# Altium PCB waku-ctl.PcbDoc (part 4 of 5)
Units mil, origin at the board's own origin, x right, y up, seen from the top; angles counter-clockwise.
Board outline 3530 x 2610 mil, 2 copper layers (Top Layer, Bottom Layer); 84 components, 84 nets, 358 pads, 106 vias.
Unrouted connection lines stored in the file: 42.
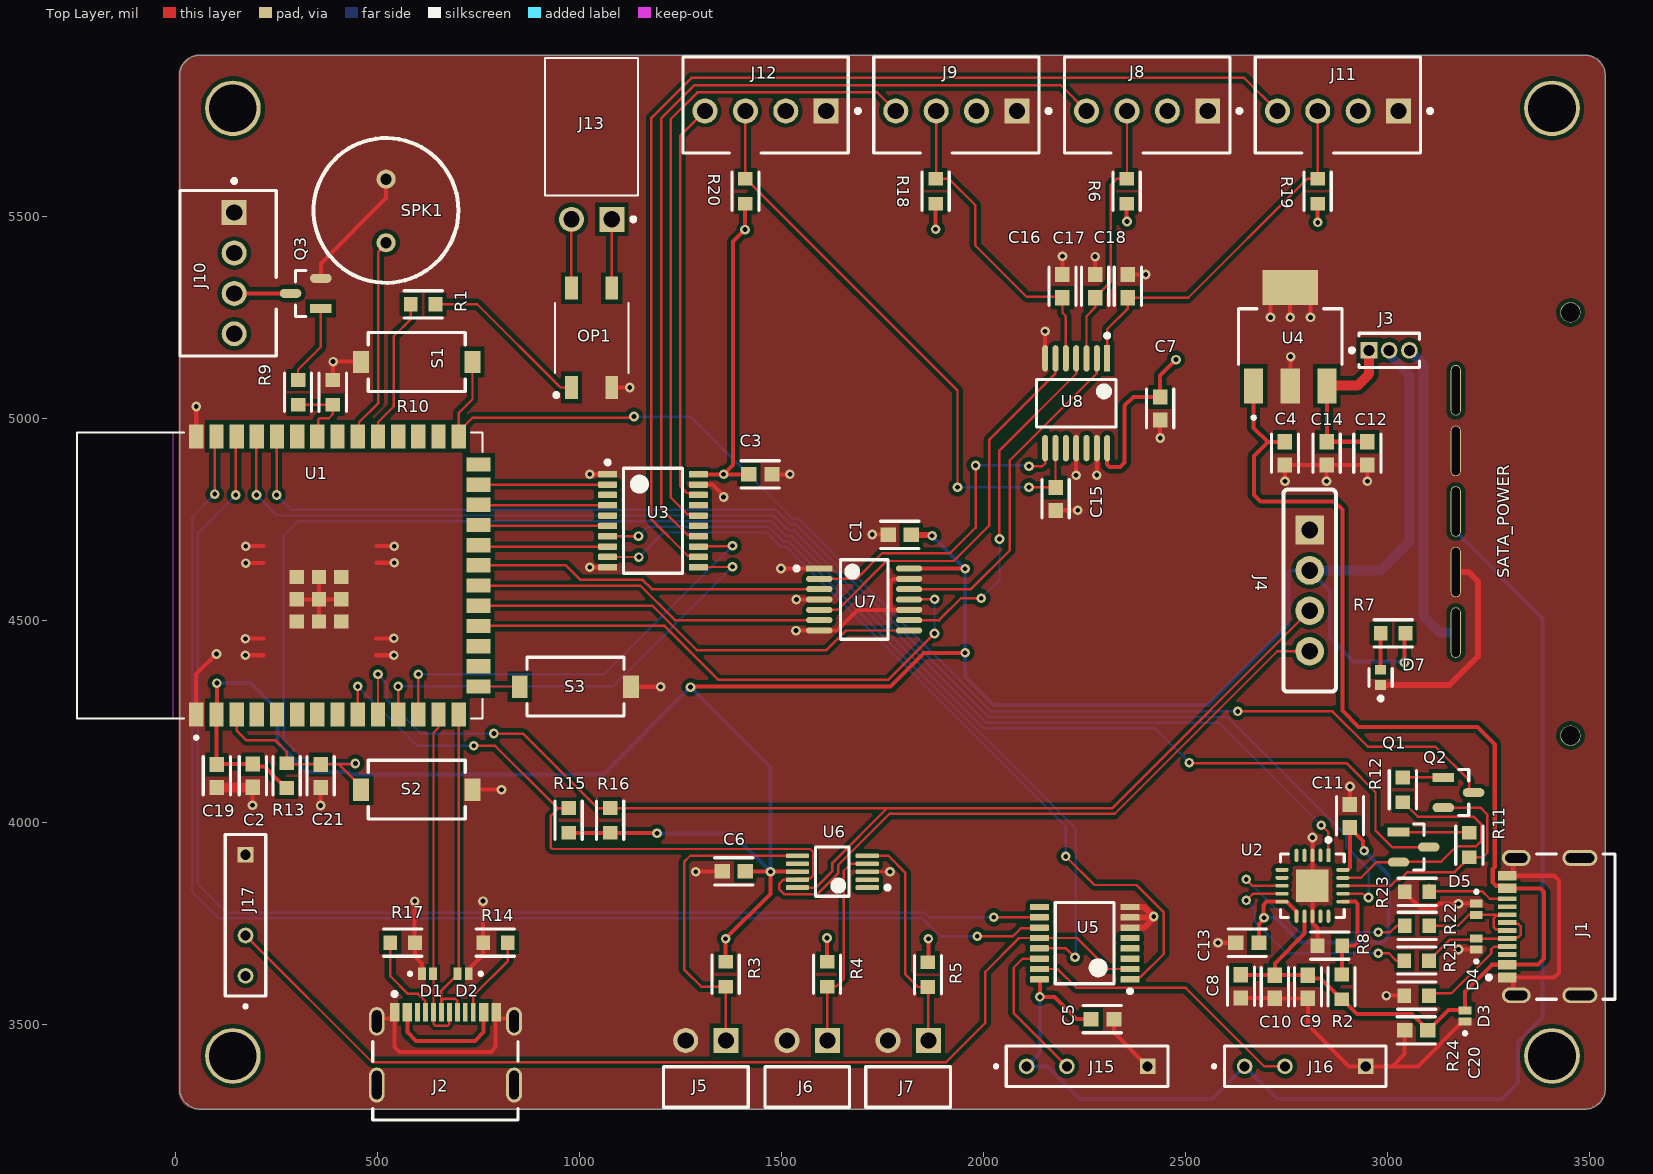
[diagram p0: Top Layer view]

## Part data (continued)
U7: "IC BUFF NON-INVERT 3.6V 14-TSSOP", Case/Package=TSSOP, High Level Output Current=-24mA, LCSC Part Number=C7813, Low Level Output Current=24mA, Manufacturer="Texas Instruments", Manufacturer Lifecycle Status=ACTIVE, Max Operating Temperature=125°C, Max Power Dissipation=500mW, Max Supply Voltage=3.6V, Min Operating Temperature=-40°C, Min Supply Voltage=1.65V, Nominal Supply Current=1µA, Supplier Part Number=296-1222-1-ND, Category="Buffers, Drivers and Transceivers", ComponentLink1Description=https://sigma.octopart.com:443/182471031/technical_drawing/Texas-Instruments-SN74LVC125APWR.pdf?src-supplier=Texas+Instruments, ComponentLink1URL=https://sigma.octopart.com:443/182471031/technical_drawing/Texas-Instruments-SN74LVC125APWR.pdf?src-supplier=Texas+Instruments, ComponentLink2Description=https://octopart.com:443/opatz8j6/c1?t=m7tao46Cp5BsUR2xromxzcu3oyl3UTX2gSNpLcE7RSWnyA1bQlshO2PU7CYxg6hfD9UrHGXilfRXLnjlrfE5w5kuYWmj-tJCYobuLsDToAOK1nIBV0ONYcJLH1_lESx9fviRCOW4VE7n0ZX3Hmg4ZcGY_rK9D-_gs0tQkOIQzTQmwu3Ya5qSTNAkHV7h3Z-kGtrXzc7b3YEboIecKnWr6GWore2FsFKhC6Lr9KwAgRBdK9X6SrQOo5Eb11oGInVgxhKaIWuGbajALS1G30ssv9H2oVfdBG0eVA0umxvZs4CxE-QhSBDAdp1FUXwVZ_l4bHMif_Slmx_GFebhfHJwZRz9uFheQxDe-vdWkP1MZL1g_AEC6eOsKIj10qOuI-F5FmlBkyTL2A&src-supplier=Texas+Instruments, ComponentLink2URL=https://octopart.com:443/opatz8j6/c1?t=m7tao46Cp5BsUR2xromxzcu3oyl3UTX2gSNpLcE7RSWnyA1bQlshO2PU7CYxg6hfD9UrHGXilfRXLnjlrfE5w5kuYWmj-tJCYobuLsDToAOK1nIBV0ONYcJLH1_lESx9fviRCOW4VE7n0ZX3Hmg4ZcGY_rK9D-_gs0tQkOIQzTQmwu3Ya5qSTNAkHV7h3Z-kGtrXzc7b3YEboIecKnWr6GWore2FsFKhC6Lr9KwAgRBdK9X6SrQOo5Eb11oGInVgxhKaIWuGbajALS1G30ssv9H2oVfdBG0eVA0umxvZs4CxE-QhSBDAdp1FUXwVZ_l4bHMif_Slmx_GFebhfHJwZRz9uFheQxDe-vdWkP1MZL1g_AEC6eOsKIj10qOuI-F5FmlBkyTL2A&src-supplier=Texas+Instruments, ComponentLink3Description=https://datasheet.octopart.com:443/SN74LVC125APWR-Texas-Instruments-datasheet-10254735.pdf?src-supplier=Texas+Instruments, ComponentLink3URL=https://datasheet.octopart.com:443/SN74LVC125APWR-Texas-Instruments-datasheet-10254735.pdf?src-supplier=Texas+Instruments, ComponentLink4Description=https://sigma.octopart.com:443/49249819/technical_drawing/Texas-Instruments-SN74LVC125APWR.pdf?src-supplier=Texas+Instruments, ComponentLink4URL=https://sigma.octopart.com:443/49249819/technical_drawing/Texas-Instruments-SN74LVC125APWR.pdf?src-supplier=Texas+Instruments, ComponentLink5Description=https://datasheet.octopart.com:443/SN74LVC125APWR-Texas-Instruments-datasheet-150516.pdf?src-supplier=Texas+Instruments, ComponentLink5URL=https://datasheet.octopart.com:443/SN74LVC125APWR-Texas-Instruments-datasheet-150516.pdf?src-supplier=Texas+Instruments, ComponentLink6Description=https://datasheet.octopart.com:443/SN74LVC125APWR-Texas-Instruments-datasheet-37101729.pdf?src-supplier=Farnell, ComponentLink6URL=https://datasheet.octopart.com:443/SN74LVC125APWR-Texas-Instruments-datasheet-37101729.pdf?src-supplier=Farnell, ComponentLink7Description=https://datasheet.octopart.com:443/SN74LVC125APWR-Texas-Instruments-datasheet-8815742.pdf?src-supplier=Farnell, ComponentLink7URL=https://datasheet.octopart.com:443/SN74LVC125APWR-Texas-Instruments-datasheet-8815742.pdf?src-supplier=Farnell, ComponentLink8Description=https://datasheet.octopart.com:443/SN74LVC125APWR-Texas-Instruments-datasheet-8758542.pdf?src-supplier=Farnell, ComponentLink8URL=https://datasheet.octopart.com:443/SN74LVC125APWR-Texas-Instruments-datasheet-8758542.pdf?src-supplier=Farnell, ComponentLink9Description=https://datasheet.octopart.com:443/SN74LVC125APWR-Texas-Instruments-datasheet-8384538.pdf?src-supplier=Farnell, ComponentLink9URL=https://datasheet.octopart.com:443/SN74LVC125APWR-Texas-Instruments-datasheet-8384538.pdf?src-supplier=Farnell, ComponentLink10Description=https://datasheet.octopart.com:443/SN74LVC125APWR-Texas-Instruments-datasheet-8141996.pdf?src-supplier=Farnell, ComponentLink10URL=https://datasheet.octopart.com:443/SN74LVC125APWR-Texas-Instruments-datasheet-8141996.pdf?src-supplier=Farnell, ComponentLink11Description=https://datasheet.octopart.com:443/SN74LVC125APWR-Texas-Instruments-datasheet-5375601.pdf?src-supplier=Farnell, ComponentLink11URL=https://datasheet.octopart.com:443/SN74LVC125APWR-Texas-Instruments-datasheet-5375601.pdf?src-supplier=Farnell, ComponentLink12Description=https://datasheet.octopart.com:443/SN74LVC125APWR.-Texas-Instruments-datasheet-48051172.pdf?src-supplier=Farnell, ComponentLink12URL=https://datasheet.octopart.com:443/SN74LVC125APWR.-Texas-Instruments-datasheet-48051172.pdf?src-supplier=Farnell, ComponentLink13Description=https://datasheet.octopart.com:443/SN74LVC125APWR-Texas-Instruments-datasheet-10079432.pdf?src-supplier=Farnell, ComponentLink13URL=https://datasheet.octopart.com:443/SN74LVC125APWR-Texas-Instruments-datasheet-10079432.pdf?src-supplier=Farnell, ComponentLink14Description=https://datasheet.octopart.com:443/SN74LVC125APWR-Texas-Instruments-datasheet-8703072.pdf?src-supplier=Farnell, ComponentLink14URL=https://datasheet.octopart.com:443/SN74LVC125APWR-Texas-Instruments-datasheet-8703072.pdf?src-supplier=Farnell, ComponentLink15Description=https://datasheet.octopart.com:443/SN74LVC125APWR-Texas-Instruments-datasheet-8702091.pdf?src-supplier=Farnell, ComponentLink15URL=https://datasheet.octopart.com:443/SN74LVC125APWR-Texas-Instruments-datasheet-8702091.pdf?src-supplier=Farnell, ComponentLink16Description=https://datasheet.octopart.com:443/SN74LVC125APWR-Texas-Instruments-datasheet-8636213.pdf?src-supplier=Farnell, ComponentLink16URL=https://datasheet.octopart.com:443/SN74LVC125APWR-Texas-Instruments-datasheet-8636213.pdf?src-supplier=Farnell, ComponentLink17Description=https://datasheet.octopart.com:443/SN74LVC125APWR-Texas-Instruments-datasheet-7836027.pdf?src-supplier=Farnell, ComponentLink17URL=https://datasheet.octopart.com:443/SN74LVC125APWR-Texas-Instruments-datasheet-7836027.pdf?src-supplier=Farnell, ComponentLink18Description=https://datasheet.octopart.com:443/SN74LVC125APWR-Texas-Instruments-datasheet-7543160.pdf?src-supplier=Farnell, ComponentLink18URL=https://datasheet.octopart.com:443/SN74LVC125APWR-Texas-Instruments-datasheet-7543160.pdf?src-supplier=Farnell, ComponentLink19Description=https://datasheet.octopart.com:443/SN74LVC125APWR-Texas-Instruments-datasheet-5319739.pdf?src-supplier=Farnell, ComponentLink19URL=https://datasheet.octopart.com:443/SN74LVC125APWR-Texas-Instruments-datasheet-5319739.pdf?src-supplier=Farnell, ComponentLink20Description=https://datasheet.octopart.com:443/SN74LVC125APWR-Texas-Instruments-datasheet-21221564.pdf?src-supplier=Upverter, ComponentLink20URL=https://datasheet.octopart.com:443/SN74LVC125APWR-Texas-Instruments-datasheet-21221564.pdf?src-supplier=Upverter, ComponentLink21Description=https://datasheet.octopart.com:443/SN74LVC125APWR-Texas-Instruments-datasheet-62118761.pdf?src-supplier=Newark, ComponentLink21URL=https://datasheet.octopart.com:443/SN74LVC125APWR-Texas-Instruments-datasheet-62118761.pdf?src-supplier=Newark, ComponentLink22Description=https://datasheet.octopart.com:443/SN74LVC125APWR-Texas-Instruments-datasheet-79172.pdf?src-supplier=Newark, ComponentLink22URL=https://datasheet.octopart.com:443/SN74LVC125APWR-Texas-Instruments-datasheet-79172.pdf?src-supplier=Newark, ComponentLink23Description=https://datasheet.octopart.com:443/SN74LVC125APWR-Texas-Instruments-datasheet-33018789.pdf?src-supplier=element14+APAC, ComponentLink23URL=https://datasheet.octopart.com:443/SN74LVC125APWR-Texas-Instruments-datasheet-33018789.pdf?src-supplier=element14+APAC, ComponentLink24Description=https://datasheet.octopart.com:443/SN74LVC125APWR-Texas-Instruments-datasheet-166100981.pdf?src-supplier=Augswan, ComponentLink24URL=https://datasheet.octopart.com:443/SN74LVC125APWR-Texas-Instruments-datasheet-166100981.pdf?src-supplier=Augswan, ComponentLink25Description=https://datasheet.octopart.com:443/SN74LVC125APWR-Texas-Instruments-datasheet-159116505.pdf?src-supplier=LCSC, ComponentLink25URL=https://datasheet.octopart.com:443/SN74LVC125APWR-Texas-Instruments-datasheet-159116505.pdf?src-supplier=LCSC, ComponentLink26Description=https://datasheet.octopart.com:443/SN74LVC125APWR-Texas-Instruments-datasheet-147835652.pdf?src-supplier=SHENGYU+ELECTRONICS, ComponentLink26URL=https://datasheet.octopart.com:443/SN74LVC125APWR-Texas-Instruments-datasheet-147835652.pdf?src-supplier=SHENGYU+ELECTRONICS, ComponentLink27Description=https://datasheet.octopart.com:443/SN74LVC125APWR-Texas-Instruments-datasheet-14144586.pdf?src-supplier=iiiC, ComponentLink27URL=https://datasheet.octopart.com:443/SN74LVC125APWR-Texas-Instruments-datasheet-14144586.pdf?src-supplier=iiiC, ComponentLink28Description=https://datasheet.octopart.com:443/SN74LVC125APWR-Texas-Instruments-datasheet-11536687.pdf?src-supplier=Arrow+Electronics, ComponentLink28URL=https://datasheet.octopart.com:443/SN74LVC125APWR-Texas-Instruments-datasheet-11536687.pdf?src-supplier=Arrow+Electronics, ComponentLink29Description=https://datasheet.octopart.com:443/SN74LVC125APWR-Texas-Instruments-datasheet-7542750.pdf?src-supplier=Jameco, ComponentLink29URL=https://datasheet.octopart.com:443/SN74LVC125APWR-Texas-Instruments-datasheet-7542750.pdf?src-supplier=Jameco, ComponentLink30Description=https://datasheet.octopart.com:443/SN74LVC125APWR-Texas-Instruments-datasheet-114787.pdf?src-supplier=Sierra+IC, ComponentLink30URL=https://datasheet.octopart.com:443/SN74LVC125APWR-Texas-Instruments-datasheet-114787.pdf?src-supplier=Sierra+IC, ComponentLink31Description=https://datasheet.octopart.com:443/SN74LVC125APWR-Texas-Instruments-datasheet-32983.pdf?src-supplier=DigiKey, ComponentLink31URL=https://datasheet.octopart.com:443/SN74LVC125APWR-Texas-Instruments-datasheet-32983.pdf?src-supplier=DigiKey, ComponentLink32Description=http://sigma.octopart.com:80/conflict_mineral_statement/Texas-Instruments-company-63.pdf?src-supplier=Compliance+Statements, ComponentLink32URL=http://sigma.octopart.com:80/conflict_mineral_statement/Texas-Instruments-company-63.pdf?src-supplier=Compliance+Statements, ComponentLink33Description=http://sigma.octopart.com:80/reach_statement/Texas-Instruments-company-64.pdf?src-supplier=Compliance+Statements, ComponentLink33URL=http://sigma.octopart.com:80/reach_statement/Texas-Instruments-company-64.pdf?src-supplier=Compliance+Statements, Contact Plating=Gold, Height=0m, Lead Free="Lead Free", Length=5mm, Lifecycle Status=Production, Logic Function="Buffer, Inverting", Manufacturer Part Number=SN74LVC125APWR, Mounting Technology="Surface Mount", Number of Bits=4, Number of Bits per Element=1, Number of Channels=4, Number of Circuits=4, Number of Elements=4, Number of Gates=4, Number of Input Lines=4, Number of Inputs=4, Number of Output Lines=3, Number of Outputs=4, Pins=14, Polarity=Non-Inverting, Pricing="1=0.32, 10=0.22, 25=0.32, 100=0.169, 250=0.15624, 500=0.14854, 1000=0.14221 (EUR)", Propagation Delay=3ns, Quiescent Current=1µA, Radiation Hardening=No, REACH SVHC=No, RoHS=Compliant, Schedule B="8542390000, 8542390000|8542390000|8542390000|8542390000|8542390000", Supplier=DigiKey, Termination=SMD/SMT, Thickness=1mm, Turn-On Delay Time=5.3ns, Width=4.4mm
U8: "IC INVERTER 6CH 1-INP 14TSSOP", Ambient Temperature Range High=85°C, Case/Package=TSSOP, High Level Output Current=-5.2mA, LCSC Part Number=C6821, Low Level Output Current=5.2mA, Manufacturer="Texas Instruments", Manufacturer Lifecycle Status=ACTIVE, Max Junction Temperature (Tj)=150°C, Max Supply Voltage=6V, Min Operating Temperature=-40°C, Min Supply Voltage=2V, Nominal Supply Current=2µA, Operating Supply Voltage=5V, Output Current=25mA, Supplier Part Number=296-8234-1-ND, Category="Logic Gates", ComponentLink1Description=https://sigma.octopart.com:443/182471031/technical_drawing/Texas-Instruments-SN74HC14PWR.pdf?src-supplier=Texas+Instruments, ComponentLink1URL=https://sigma.octopart.com:443/182471031/technical_drawing/Texas-Instruments-SN74HC14PWR.pdf?src-supplier=Texas+Instruments, ComponentLink2Description=https://octopart.com:443/opatz8j6/c1?t=mgRqS-hfAv7mW99aHGtXe0uUQtkE4j_ResFexbnUcfozyNiycuVPUD79LJdKfGOCnCdkgkYZTUKD9_-dfm0Fcd2jq3Eu8k-uXuUYFXBpJ7Fb_Dfnew8Ij2yrF2NZXflAE1Q8RIB_BRTD8wfNgg4gHkuUohgl8J8utb9PDFkQshknjIQL1jQPyJjA17LwX5cfq7MDZsGjhLLtgG-DO7cbyCef4COWysZxDjztciZmLaZLrABMH2FQMHC6HNyCzTqN1Wgw2LiaTUC6_zrgfsxfl-iQ2kU3qIlY6q5pj8XVvm1obkSu-F1OyAmKNyh8mkA6ypTuZJh0ZT_h2OZ458n8XOPegfQ8-jxvAxswD2V3FJ6yclYDOJwov7Kxj2cqY3xhFk-1Ew&src-supplier=Texas+Instruments, ComponentLink2URL=https://octopart.com:443/opatz8j6/c1?t=mgRqS-hfAv7mW99aHGtXe0uUQtkE4j_ResFexbnUcfozyNiycuVPUD79LJdKfGOCnCdkgkYZTUKD9_-dfm0Fcd2jq3Eu8k-uXuUYFXBpJ7Fb_Dfnew8Ij2yrF2NZXflAE1Q8RIB_BRTD8wfNgg4gHkuUohgl8J8utb9PDFkQshknjIQL1jQPyJjA17LwX5cfq7MDZsGjhLLtgG-DO7cbyCef4COWysZxDjztciZmLaZLrABMH2FQMHC6HNyCzTqN1Wgw2LiaTUC6_zrgfsxfl-iQ2kU3qIlY6q5pj8XVvm1obkSu-F1OyAmKNyh8mkA6ypTuZJh0ZT_h2OZ458n8XOPegfQ8-jxvAxswD2V3FJ6yclYDOJwov7Kxj2cqY3xhFk-1Ew&src-supplier=Texas+Instruments, ComponentLink3Description=https://datasheet.octopart.com:443/SN74HC14PWR-Texas-Instruments-datasheet-22122188.pdf?src-supplier=Texas+Instruments, ComponentLink3URL=https://datasheet.octopart.com:443/SN74HC14PWR-Texas-Instruments-datasheet-22122188.pdf?src-supplier=Texas+Instruments, ComponentLink4Description=https://datasheet.octopart.com:443/SN74HC14PWR-Texas-Instruments-datasheet-10743327.pdf?src-supplier=Texas+Instruments, ComponentLink4URL=https://datasheet.octopart.com:443/SN74HC14PWR-Texas-Instruments-datasheet-10743327.pdf?src-supplier=Texas+Instruments, ComponentLink5Description=https://datasheet.octopart.com:443/SN74HC14PWR-Texas-Instruments-datasheet-10254369.pdf?src-supplier=Texas+Instruments, ComponentLink5URL=https://datasheet.octopart.com:443/SN74HC14PWR-Texas-Instruments-datasheet-10254369.pdf?src-supplier=Texas+Instruments, ComponentLink6Description=https://sigma.octopart.com:443/49249819/technical_drawing/Texas-Instruments-SN74HC14PWR.pdf?src-supplier=Texas+Instruments, ComponentLink6URL=https://sigma.octopart.com:443/49249819/technical_drawing/Texas-Instruments-SN74HC14PWR.pdf?src-supplier=Texas+Instruments, ComponentLink7Description=https://datasheet.octopart.com:443/SN74HC14PWR-Texas-Instruments-datasheet-151874.pdf?src-supplier=Texas+Instruments, ComponentLink7URL=https://datasheet.octopart.com:443/SN74HC14PWR-Texas-Instruments-datasheet-151874.pdf?src-supplier=Texas+Instruments, ComponentLink8Description=https://datasheet.octopart.com:443/SN74HC14PWR-Texas-Instruments-datasheet-37129453.pdf?src-supplier=Farnell, ComponentLink8URL=https://datasheet.octopart.com:443/SN74HC14PWR-Texas-Instruments-datasheet-37129453.pdf?src-supplier=Farnell, ComponentLink9Description=https://datasheet.octopart.com:443/SN74HC14PWR-Texas-Instruments-datasheet-12357349.pdf?src-supplier=Farnell, ComponentLink9URL=https://datasheet.octopart.com:443/SN74HC14PWR-Texas-Instruments-datasheet-12357349.pdf?src-supplier=Farnell, ComponentLink10Description=https://datasheet.octopart.com:443/SN74HC14PWR-Texas-Instruments-datasheet-11517478.pdf?src-supplier=Farnell, ComponentLink10URL=https://datasheet.octopart.com:443/SN74HC14PWR-Texas-Instruments-datasheet-11517478.pdf?src-supplier=Farnell, ComponentLink11Description=https://datasheet.octopart.com:443/SN74HC14PWR-Texas-Instruments-datasheet-62115966.pdf?src-supplier=Farnell, ComponentLink11URL=https://datasheet.octopart.com:443/SN74HC14PWR-Texas-Instruments-datasheet-62115966.pdf?src-supplier=Farnell, ComponentLink12Description=https://datasheet.octopart.com:443/SN74HC14PWR-Texas-Instruments-datasheet-147851288.pdf?src-supplier=Upverter, ComponentLink12URL=https://datasheet.octopart.com:443/SN74HC14PWR-Texas-Instruments-datasheet-147851288.pdf?src-supplier=Upverter, ComponentLink13Description=https://datasheet.octopart.com:443/SN74HC14PWR-Texas-Instruments-datasheet-62313149.pdf?src-supplier=Newark, ComponentLink13URL=https://datasheet.octopart.com:443/SN74HC14PWR-Texas-Instruments-datasheet-62313149.pdf?src-supplier=Newark, ComponentLink14Description=https://datasheet.octopart.com:443/SN74HC14PWR-Texas-Instruments-datasheet-32036646.pdf?src-supplier=element14+APAC, ComponentLink14URL=https://datasheet.octopart.com:443/SN74HC14PWR-Texas-Instruments-datasheet-32036646.pdf?src-supplier=element14+APAC, ComponentLink15Description=https://datasheet.octopart.com:443/SN74HC14PWR-Texas-Instruments-datasheet-165804426.pdf?src-supplier=LCSC, ComponentLink15URL=https://datasheet.octopart.com:443/SN74HC14PWR-Texas-Instruments-datasheet-165804426.pdf?src-supplier=LCSC, ComponentLink16Description=https://datasheet.octopart.com:443/SN74HC14PWR-Texas-Instruments-datasheet-159116051.pdf?src-supplier=LCSC, ComponentLink16URL=https://datasheet.octopart.com:443/SN74HC14PWR-Texas-Instruments-datasheet-159116051.pdf?src-supplier=LCSC, ComponentLink17Description=https://datasheet.octopart.com:443/SN74HC14PWR-Texas-Instruments-datasheet-166100818.pdf?src-supplier=Augswan, ComponentLink17URL=https://datasheet.octopart.com:443/SN74HC14PWR-Texas-Instruments-datasheet-166100818.pdf?src-supplier=Augswan, ComponentLink18Description=https://datasheet.octopart.com:443/SN74HC14PWR-Texas-Instruments-datasheet-137316104.pdf?src-supplier=Future+Electronics, ComponentLink18URL=https://datasheet.octopart.com:443/SN74HC14PWR-Texas-Instruments-datasheet-137316104.pdf?src-supplier=Future+Electronics, ComponentLink19Description=https://datasheet.octopart.com:443/SN74HC14PWR-Texas-Instruments-datasheet-14147618.pdf?src-supplier=iiiC, ComponentLink19URL=https://datasheet.octopart.com:443/SN74HC14PWR-Texas-Instruments-datasheet-14147618.pdf?src-supplier=iiiC, ComponentLink20Description=https://datasheet.octopart.com:443/SN74HC14PWR-Texas-Instruments-datasheet-11551913.pdf?src-supplier=Arrow+Electronics, ComponentLink20URL=https://datasheet.octopart.com:443/SN74HC14PWR-Texas-Instruments-datasheet-11551913.pdf?src-supplier=Arrow+Electronics, ComponentLink21Description=https://datasheet.octopart.com:443/SN74HC14PWR-Texas-Instruments-datasheet-41751.pdf?src-supplier=DigiKey, ComponentLink21URL=https://datasheet.octopart.com:443/SN74HC14PWR-Texas-Instruments-datasheet-41751.pdf?src-supplier=DigiKey, ComponentLink22Description=https://datasheet.octopart.com:443/SN74HC14PWR-Texas-Instruments-datasheet-7558321.pdf?src-supplier=Jameco, ComponentLink22URL=https://datasheet.octopart.com:443/SN74HC14PWR-Texas-Instruments-datasheet-7558321.pdf?src-supplier=Jameco, ComponentLink23Description=https://datasheet.octopart.com:443/SN74HC14PWR-Texas-Instruments-datasheet-114860.pdf?src-supplier=Sierra+IC, ComponentLink23URL=https://datasheet.octopart.com:443/SN74HC14PWR-Texas-Instruments-datasheet-114860.pdf?src-supplier=Sierra+IC, ComponentLink24Description=http://sigma.octopart.com:80/conflict_mineral_statement/Texas-Instruments-company-63.pdf?src-supplier=Compliance+Statements, ComponentLink24URL=http://sigma.octopart.com:80/conflict_mineral_statement/Texas-Instruments-company-63.pdf?src-supplier=Compliance+Statements, ComponentLink25Description=http://sigma.octopart.com:80/reach_statement/Texas-Instruments-company-64.pdf?src-supplier=Compliance+Statements, ComponentLink25URL=http://sigma.octopart.com:80/reach_statement/Texas-Instruments-company-64.pdf?src-supplier=Compliance+Statements, Contact Plating=Gold, Height=0m, Lead Free="Lead Free", Length=5mm, Lifecycle Status=Production, Logic Function="Buffer, Inverter, Schmitt Trigger", Manufacturer Part Number=SN74HC14PWR, Max Operating Temperature=85°C, Mounting Technology="Surface Mount", Number of Bits=6, Number of Channels=6, Number of Circuits=6, Number of Elements=6, Number of Gates=6, Number of Inputs=1, Number of Outputs=1, Pins=14, Pricing="1=0.25, 10=0.174, 25=0.25, 100=0.1324, 250=0.12204, 500=0.11582, 1000=0.11069 (EUR)", Propagation Delay=11ns, Quiescent Current=2µA, Radiation Hardening=No, REACH SVHC=No, RoHS=Compliant, Schedule B="8542390000, 8542390000|8542390000|8542390000|8542390000|8542390000", Stock=34107, Supplier=DigiKey, Thickness=1mm, Turn-On Delay Time=31ns, Weight=57.209338mg, Width=4.4mm

## Free pads (board coordinates)
  round 137.8 hole 118.11 paste-99999 mask+4: MH16(3408.27,5768.27) MH17(141.73,5768.27) MH18(141.73,3421.73) MH19(3408.27,3421.73)

## Via types
v1: diameter 24, hole 12, Top Layer to Bottom Layer, tented both sides, 106 vias